# EAGLE board konzole_single (EAGLE 9.6.2)
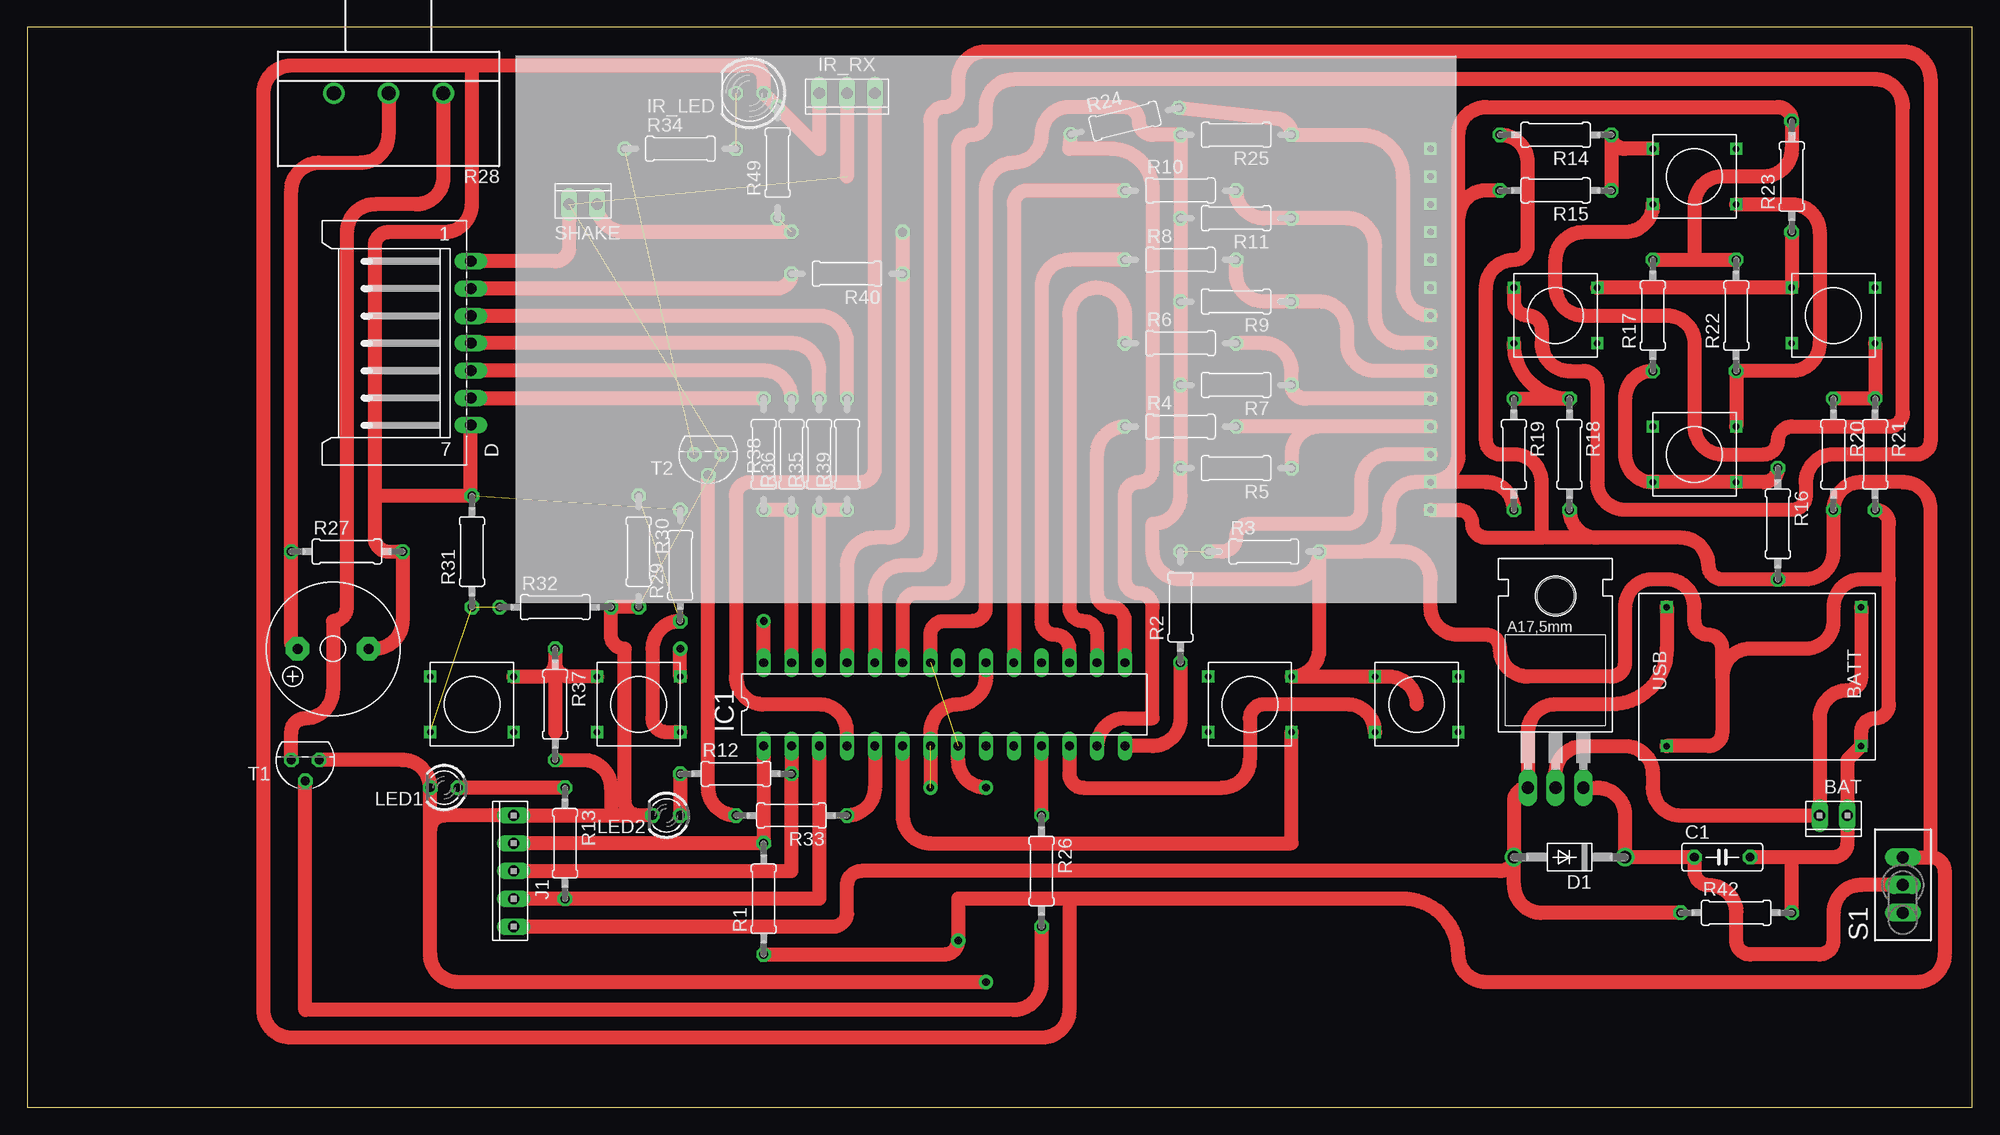
[diagram p0: board, top side]
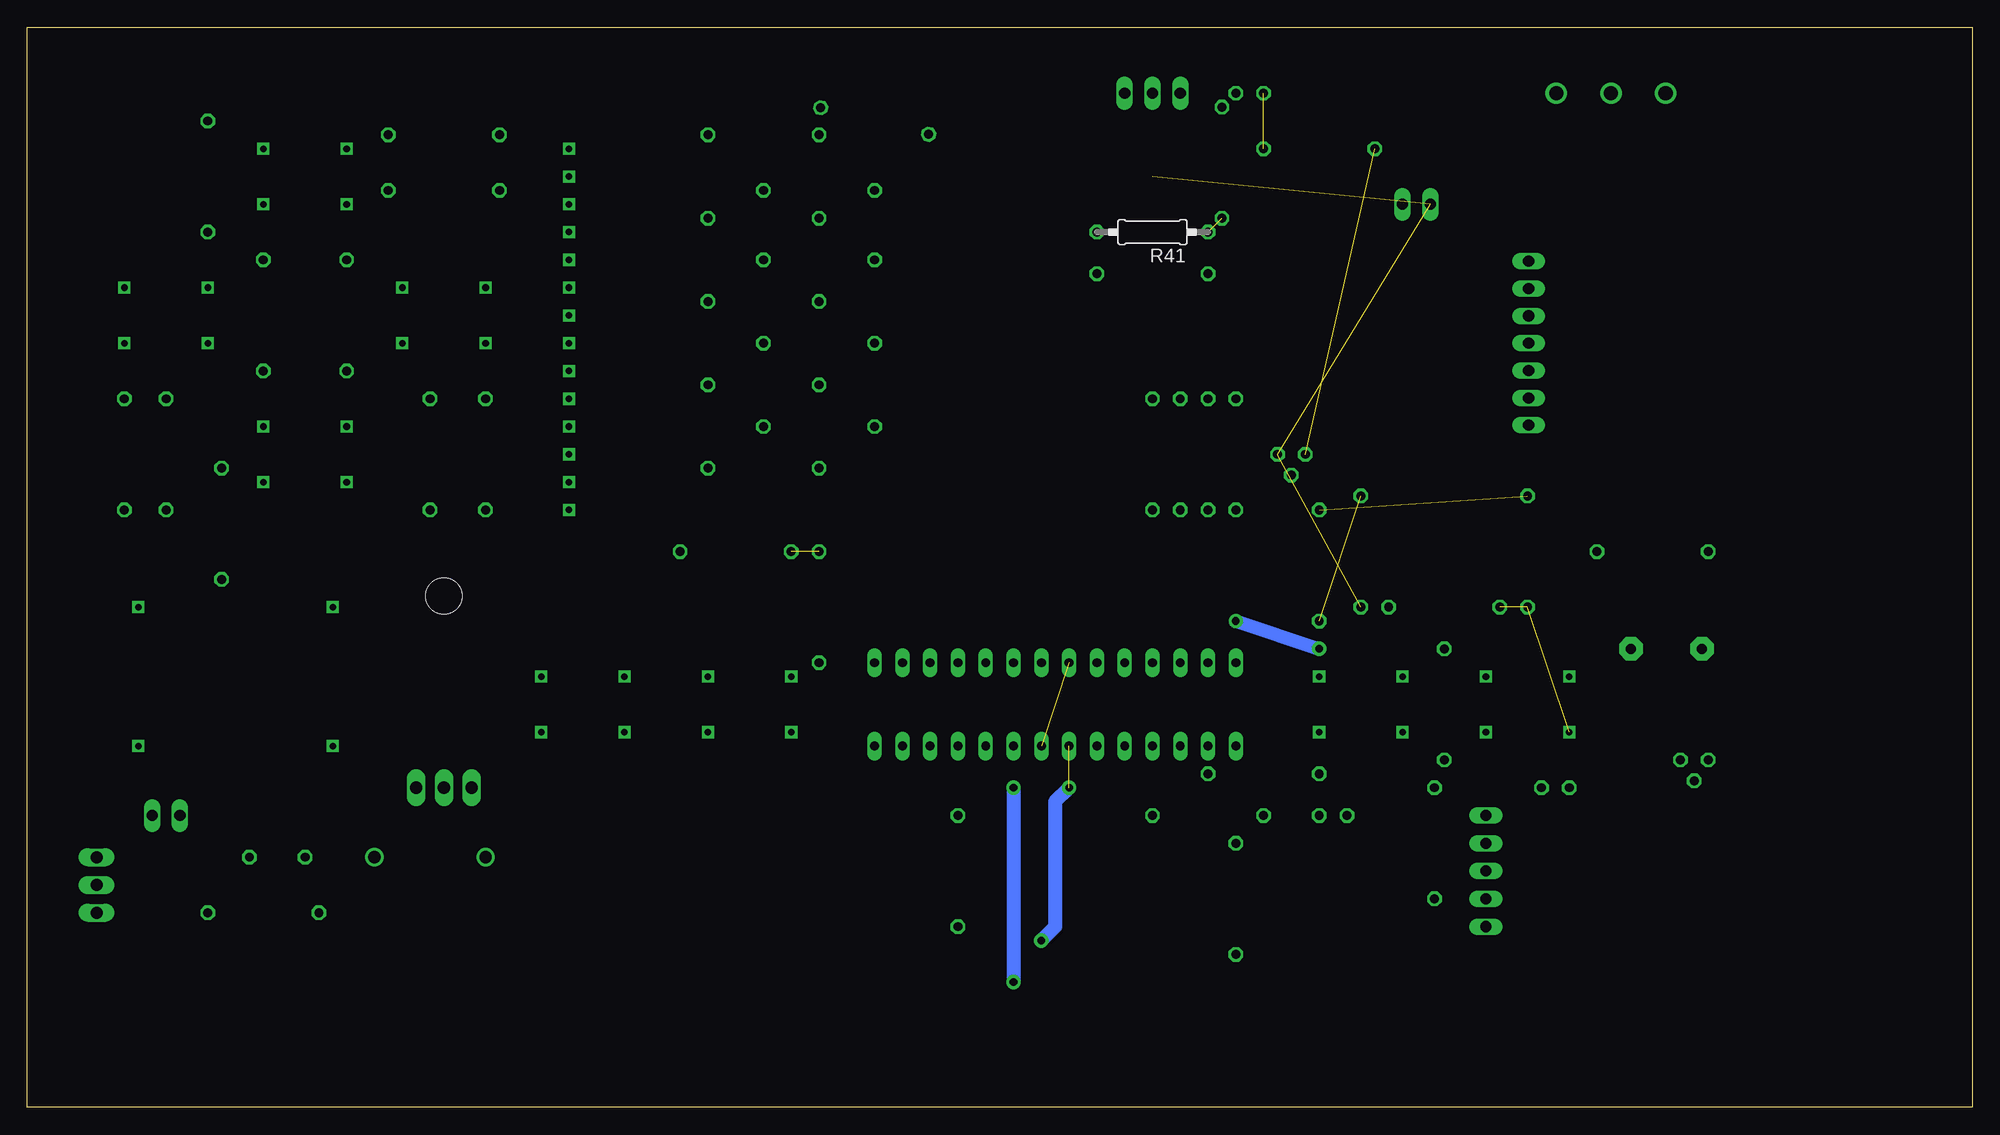
[diagram p1: board, bottom side, seen from below]

Size 177.78 x 98.73 mm. Coordinates in mm from the lower left corner, seen from the top.
Outline: 0,0 177.78,0 177.78,98.73 0,98.73 0,0
Copper layers (1*16): Top 0.035mm / dielectric 1.5mm / Bottom 0.035mm
Design rules "default": minimum track width 6mil, minimum drill 0.35mm, track to track 6mil, track to pad 6mil, pad to pad 6mil, via to via 6mil, smd to smd 6mil, copper to edge 40mil, drill to drill 6mil, minimum pad ring 10mil, minimum via ring 8mil, stop-mask expansion 4mil, vias tented up to drill 0mil, thermal gap 10mil

## Footprints (pad centres in the part's own frame; a part is rotated, then mirrored left to right if it is on the bottom)
10X02MTA = drill 1.016 long: 1 1.27,0; 2 -1.27,0
C050-025X075 = drill 0.813 octagon: 1 -2.54,0; 2 2.54,0
L07P = drill 1.016 long: 1 7.5,-6.25; 2 5,-6.25; 3 2.5,-6.25; 4 0,-6.25; 5 -2.5,-6.25; 6 -5,-6.25; 7 -7.5,-6.25
DO41-10 = drill 1.118: A 5.08,0; C -5.08,0
DIL28-3 = drill 0.813 long: 1 -16.51,-3.81; 2 -13.97,-3.81; 3 -11.43,-3.81; 4 -8.89,-3.81; 5 -6.35,-3.81; 6 -3.81,-3.81; 7 -1.27,-3.81; 8 1.27,-3.81; 9 3.81,-3.81; 10 6.35,-3.81; 11 8.89,-3.81; 12 11.43,-3.81; 13 13.97,-3.81; 14 16.51,-3.81; 15 16.51,3.81; 16 13.97,3.81; 17 11.43,3.81; 18 8.89,3.81; 19 6.35,3.81; 20 3.81,3.81; 21 1.27,3.81; 22 -1.27,3.81; 23 -3.81,3.81; 24 -6.35,3.81; 25 -8.89,3.81; 26 -11.43,3.81; 27 -13.97,3.81; 28 -16.51,3.81
LED5MM = drill 0.813 octagon: A -1.27,0; K 1.27,0
10X03MTA = drill 1.016 long: 1 2.54,0; 2 0,0; 3 -2.54,0
10X05MTA = drill 1.016 long: 1 5.08,0; 2 2.54,0; 3 0,0; 4 -2.54,0; 5 -5.08,0
LED3MM = drill 0.813 octagon: A -1.27,0; K 1.27,0
TO220BH = drill 1.118 long: D 0,-6.35; G -2.54,-6.35; S 2.54,-6.35 | hole 3.302: 0,11.176
0207/10 = drill 0.813 octagon: 1 -5.08,0; 2 5.08,0
CIP20C-6MM = drill 1.3 pad 1.93: A -5,0; E 5,0; S 0,0
TL3XPO = drill 1.1 pad 1.422 long: 1 -2.54,0; 2 0,0; 3 2.54,0
F/QMX = drill 0.914 pad 2.159 octagon: + 3.251,0; - -3.251,0
TO92 = drill 0.813 octagon: 1 1.27,0; 2 0,1.905; 3 -1.27,0
TACT = drill 0.6 square: P$1 -3.81,2.54; P$2 -3.81,-2.54; P$3 3.81,-2.54; P$4 3.81,2.54
DISPLAY = drill 0.6 square: CS -40.64,11.43; D/C -40.64,6.35; GND -40.64,13.97; LED -40.64,-1.27; RESET -40.64,8.89; SCK -40.64,1.27; SDI -40.64,3.81; SDO -40.64,-3.81; T_CLK -40.64,-6.35; T_CS -40.64,-8.89; T_DIN -40.64,-11.43; T_IRQ -40.64,-16.51; T_OUT -40.64,-13.97; VCC -40.64,16.51
LI_ION_CHARGER = drill 0.6 square: BAT+ 8.89,6.35; BAT- 8.89,-6.35; GND -8.89,-6.35; VIN -8.89,6.35

## Placement (x,y rotation side)
BAT  [10X02MTA]  165.1,26.67 180 top
C1  1uF  [C050-025X075]  154.94,22.86 0 top
D  [L07P]  34.29,69.85 90 top
D1  1N4004  [DO41-10]  140.97,22.86 180 top
IC1  MEGA8-P  [DIL28-3]  83.82,36.83 0 top
IR_LED  [LED5MM]  66.04,92.71 180 top
IR_RX  [10X03MTA]  74.93,92.71 180 top
J1  [10X05MTA]  44.45,21.59 90 top
LED1  [LED3MM]  38.1,29.21 180 top
LED2  [LED3MM]  58.42,26.67 180 top
Q1  IRF4905  [TO220BH]  139.7,35.56 0 top
R1  10k  [0207/10]  67.31,19.05 90 top
R2  1k  [0207/10]  105.41,45.72 90 top
R3  2k  [0207/10]  113.03,50.8 0 top
R4  1k  [0207/10]  105.41,62.23 0 top
R5  2k  [0207/10]  110.49,58.42 180 top
R6  1k  [0207/10]  105.41,69.85 0 top
R7  2k  [0207/10]  110.49,66.04 180 top
R8  1k  [0207/10]  105.41,77.47 0 top
R9  2k  [0207/10]  110.49,73.66 180 top
R10  1k  [0207/10]  105.41,83.82 0 top
R11  2k  [0207/10]  110.49,81.28 180 top
R12  10k  [0207/10]  64.77,30.48 0 top
R13  10k  [0207/10]  49.15,24.13 270 top
R14  10k  [0207/10]  139.7,88.9 180 top
R15  1k  [0207/10]  139.7,83.82 180 top
R16  10k  [0207/10]  160.02,53.34 270 top
R17  3k  [0207/10]  148.59,72.39 90 top
R18  10k  [0207/10]  140.97,59.69 270 top
R19  1k  [0207/10]  135.89,59.69 270 top
R20  10k  [0207/10]  165.1,59.69 270 top
R21  3k  [0207/10]  168.91,59.69 270 top
R22  10k  [0207/10]  156.21,72.39 90 top
R23  10k  [0207/10]  161.29,85.09 90 top
R24  1k  [0207/10]  100.33,90.17 13.8 top
R25  2k  [0207/10]  110.49,88.9 180 top
R26  1k  [0207/10]  92.71,21.59 270 top
R27  1k  [0207/10]  29.21,50.8 0 top
R28  [CIP20C-6MM]  33.02,92.71 180 top
R29  10k  [0207/10]  59.69,49.53 90 top
R30  1k  [0207/10]  55.88,50.8 270 top
R31  10k  [0207/10]  40.64,50.8 90 top
R32  3k  [0207/10]  48.26,45.72 0 top
R33  1k  [0207/10]  69.85,26.67 180 top
R34  47Ohm  [0207/10]  59.69,87.63 0 top
R35  1k  [0207/10]  72.39,59.69 90 top
R36  2k  [0207/10]  69.85,59.69 90 top
R37  10k  [0207/10]  48.26,36.83 270 top
R38  1k  [0207/10]  67.31,59.69 90 top
R39  2k  [0207/10]  74.93,59.69 90 top
R40  1k  [0207/10]  74.93,76.2 180 top
R41  2k  [0207/10]  74.93,80.01 180 bottom
R42  100k  [0207/10]  156.21,17.78 0 top
R49  10k  [0207/10]  68.58,86.36 90 top
S1  TL36PO  [TL3XPO]  171.45,20.32 90 top
SG1  F/QMX  [F/QMX]  27.94,41.91 180 top
SHAKE  [10X02MTA]  50.8,82.55 0 top
T1  2N3904  [TO92]  25.4,31.75 180 top
T2  2N3904  [TO92]  62.23,59.69 180 top
U$1  TACT  [TACT]  152.4,85.09 0 top
U$2  DISPLAY  [DISPLAY]  87.63,71.12 180 top
U$3  TACT  [TACT]  139.7,72.39 0 top
U$4  TACT  [TACT]  165.1,72.39 0 top
U$5  TACT  [TACT]  152.4,59.69 180 top
U$6  TACT  [TACT]  111.76,36.83 0 top
U$7  TACT  [TACT]  127,36.83 0 top
U$8  TACT  [TACT]  55.88,36.83 180 top
U$9  TACT  [TACT]  40.64,36.83 180 top
U$10  LI_ION_CHARGER  [LI_ION_CHARGER]  158.75,39.37 0 top

## Library data of the parts
BAT IR_RX J1 SHAKE = con-amp
C1 = rcl; SPICEPREFIX: C
D = con-amp-mt; OC_FARNELL: unknown; OC_NEWARK: unknown
D1 = diode
IC1 = atmel; OC_FARNELL: unknown; OC_NEWARK: unknown
IR_LED LED1 LED2 = led
Q1 = transistor-power
R1-R27 R29-R42 R49 = rcl; SPICEPREFIX: R
R28 = pot
S1 = switch
SG1 = buzzer; OC_FARNELL: unknown; OC_NEWARK: unknown
T1 T2 = transistor
U$1-U$10 = PSicho

## Nets
+5V: D.7 IC1.7 IC1.20 IR_LED.A IR_RX.1 R1.1 R14.2 R16.2 R18.2 R20.2 R27.2 R29.2 R31.2 R49.2 S1.3 SG1.- U$2.VCC
GND: BAT.2 C1.2 D.1 IC1.8 IC1.22 IR_RX.2 J1.1 LED1.K LED2.K R3.2 R5.2 R7.2 R9.2 R11.2 R15.2 R17.2 R19.2 R21.2 R22.2 R23.2 R25.2 R30.2 R32.2 R37.2 R42.2 SHAKE.2 T1.3 T2.3 U$2.GND U$6.P$4 U$7.P$1 U$10.BAT- U$10.GND
N$1: IC1.1 J1.2 R1.2
N$2: R2.2 R3.1 U$2.CS
N$3: R4.2 R5.1 U$2.RESET
N$4: R6.2 R7.1 U$2.D/C
N$5: R8.2 R9.1 U$2.SDI
N$6: R10.2 R11.1 U$2.SCK
N$7: IC1.17 R8.1
N$8: IC1.13 R24.1
N$9: IC1.16 R6.1
N$10: IC1.15 R4.1
N$11: R14.1 R15.1 U$1.P$1
N$12: R27.1 R28.S SG1.+
N$13: IC1.19 R10.1
N$14: R16.1 R17.1 U$5.P$1 U$5.P$4
N$15: R18.1 R19.1 U$3.P$2
N$16: R20.1 R21.1 U$4.P$3
N$17: LED1.A R13.1
N$18: LED2.A R12.1
N$19: IC1.2 J1.3 R12.2
N$20: IC1.3 J1.4 R13.2
N$21: R23.1 U$3.P$4 U$4.P$1
N$22: R22.1 U$1.P$3 U$5.P$2
N$23: IC1.23 U$1.P$2
N$24: R24.2 R25.1 U$2.LED
N$25: IC1.24 U$3.P$1
N$26: R26.2 T1.2
N$27: IC1.11 R26.1
N$28: R28.A T1.1
N$29: R29.1 R30.1 U$8.P$1
N$30: IC1.14 R2.1
N$31: R31.1 R32.1 U$9.P$4
N$32: IC1.12 U$7.P$2
N$33: IC1.28 U$8.P$2
N$34: IC1.6 U$6.P$3
N$35: R37.1 U$8.P$3 U$9.P$2
N$36: IC1.4 IR_RX.3
N$37: R33.2 T2.2
N$38: R34.1 T2.1
N$39: IR_LED.K R34.2
N$40: IC1.5 R33.1
N$41: D.6 R38.2
N$42: D.5 R36.2
N$43: D.4 R35.2
N$44: BAT.1 Q1.D U$10.BAT+
N$45: D.3 R39.2
N$46: D.2 R40.2
N$48: IC1.26 R35.1 R39.1
N$49: R41.1 R49.1 SHAKE.1
N$50: D1.A J1.5 Q1.G R42.1 U$10.VIN
N$51: C1.1 D1.C Q1.S S1.2
N$52: IC1.25 R40.1 R41.2
N$54: IC1.27 R36.1 R38.1

## Tracks (layer width: path | path; a pad name or v marks a point on that pad's centre or on a via)
+5V  (via drill 0.7 pad 1.3)  (2 unrouted)
  Top 1.27: U$2.VCC 130.81,54.61 arc-90 132.08,53.34 arc90 133.35,52.07 138.43,52.07 | R14.2 arc-90 137.16,86.36 137.16,78.74 arc-90 135.89,77.47 arc90 133.35,74.93 133.35,60.96 arc90 134.62,59.69 135.89,59.69 arc-90 138.43,57.15 138.43,52.07 | R18.2 arc90 143.51,52.07 | 143.51,52.07 151.13,52.07 arc-90 153.67,49.53 arc90 154.94,48.26 R16.2 162.56,48.26 arc90 165.1,50.8 R20.2 arc-90 167.64,57.15 171.45,57.15 arc-90 173.99,54.61 173.99,22.86 | 143.51,52.07 138.43,52.07 | IR_RX.1 72.39,87.63 R49.2 IR_LED.A 67.31,93.98 arc90 66.04,95.25 40.64,95.25 | S1.3 173.99,22.86 | 173.99,22.86 arc-90 175.26,21.59 175.26,13.97 arc-90 172.72,11.43 133.35,11.43 arc-90 130.81,13.97 arc90 125.73,19.05 95.25,19.05 | IC1.20 87.63,39.37 arc-90 85.09,36.83 arc90 82.55,34.29 v82.55,29.21 | SG1.- 31.75,41.91 arc90 34.29,44.45 R27.2 33.02,50.8 arc-90 31.75,52.07 31.75,55.88 | 95.25,19.05 85.09,19.05 v85.09,15.24 arc-90 83.82,13.97 R1.1 | 31.75,55.88 31.75,78.74 arc-90 33.02,80.01 38.1,80.01 arc90 40.64,82.55 40.64,95.25 | 95.25,19.05 95.25,8.89 arc-90 92.71,6.35 24.13,6.35 arc-90 21.59,8.89 21.59,92.71 arc-90 24.13,95.25 40.64,95.25 | D.7 40.54,55.98 arc90 R31.2 31.75,55.88
  Bottom 1.27: v82.55,29.21 83.82,27.94 83.82,16.51 v85.09,15.24
GND  (via drill 0.7 pad 1.3)  (4 unrouted)
  Top 1.27: U$2.GND 127,57.15 arc90 124.46,54.61 124.46,53.34 arc-90 121.92,50.8 | R3.2 121.92,50.8 | R3.2 arc-90 115.57,48.26 105.41,48.26 arc-90 102.87,50.8 102.87,53.34 arc90 105.41,55.88 R5.2 R7.2 R9.2 R11.2 R25.2 102.87,88.9 arc-90 101.6,90.17 arc90 100.33,91.44 95.25,91.44 arc90 92.71,88.9 arc-90 90.17,86.36 arc90 87.63,83.82 87.63,45.72 arc-90 86.36,44.45 83.82,44.45 arc90 82.55,43.18 IC1.22 82.55,41.91 | R17.2 152.4,77.47 | 152.4,77.47 R22.2 | R15.2 133.35,83.82 arc90 130.81,81.28 | U$2.GND arc90 130.81,59.69 130.81,81.28 | 130.81,81.28 130.81,88.9 arc-90 133.35,91.44 160.02,91.44 arc-90 R23.2 161.29,87.63 arc-90 158.75,85.09 154.94,85.09 arc90 152.4,82.55 152.4,77.47 | R21.2 arc-90 170.18,53.34 170.18,48.26 | 170.18,48.26 170.18,36.83 arc-90 168.91,35.56 arc90 167.64,34.29 U$10.BAT- 166.37,31.75 BAT.2 166.37,24.13 arc-90 165.1,22.86 161.29,22.86 | R19.2 arc90 133.35,57.15 U$2.GND | R42.2 161.29,22.86 | 170.18,48.26 167.64,48.26 arc90 165.1,45.72 165.1,44.45 arc-90 162.56,41.91 157.48,41.91 arc90 154.94,39.37 | 154.94,39.37 154.94,34.29 arc-90 153.67,33.02 U$10.GND | 154.94,39.37 154.94,41.91 arc90 153.67,43.18 arc-90 152.4,44.45 152.4,45.72 arc90 149.86,48.26 148.59,48.26 arc90 146.05,45.72 146.05,40.64 arc-90 144.78,39.37 137.16,39.37 arc-90 134.62,41.91 arc90 133.35,43.18 130.81,43.18 arc-90 128.27,45.72 128.27,48.26 arc90 125.73,50.8 121.92,50.8 | 161.29,22.86 C1.2 | R3.2 118.11,41.91 arc-90 U$6.P$4 U$7.P$1 124.46,39.37 arc-90 127,36.83 | D.1 48.26,77.35 arc90 49.53,78.62 SHAKE.2 | v87.63,11.43 39.37,11.43 arc-90 36.83,13.97 36.83,25.4
  Top 1.27: v87.63,29.21 arc-90 85.09,31.75 IC1.8 | 36.83,25.4 arc-90 38.1,26.67 J1.1 53.34,26.67 | 36.83,25.4 LED1.K arc90 34.29,31.75 T1.3 | 53.34,26.67 55.88,26.67 | LED2.K 55.88,26.67 | R37.2 50.8,31.75 arc-90 53.34,29.21 53.34,26.67 | IR_RX.2 74.93,85.09 | 55.88,26.67 arc-90 54.61,27.94 54.61,41.91 arc-90 53.34,43.18 R32.2 R30.2
  Bottom 1.27: v87.63,29.21 v87.63,11.43
N$1
  Top 1.27: IC1.1 R1.2 J1.2
N$2  (1 unrouted)
  Top 1.27: U$2.CS 124.46,59.69 arc90 121.92,57.15 121.92,54.61 arc-90 120.65,53.34 111.76,53.34 arc90 110.49,52.07 arc-90 109.22,50.8 R3.1
N$3
  Top 1.27: R5.1 115.57,59.69 arc-90 118.11,62.23 U$2.RESET R4.2
N$4
  Top 1.27: U$2.D/C 116.84,64.77 arc-90 R7.1 115.57,67.31 arc90 113.03,69.85 R6.2
N$5
  Top 1.27: U$2.SDI 123.19,67.31 arc-90 120.65,69.85 120.65,71.12 arc90 118.11,73.66 R9.1 113.03,73.66 arc-90 110.49,76.2 R8.2
N$6
  Top 1.27: U$2.SCK 125.73,69.85 arc-90 123.19,72.39 123.19,78.74 arc90 120.65,81.28 R11.1 113.03,81.28 arc-90 R10.2
N$7
  Top 1.27: R8.1 95.25,77.47 arc90 92.71,74.93 92.71,44.45 arc90 93.98,43.18 arc-90 95.25,41.91 IC1.17
N$8
  Top 1.27: IC1.13 arc-90 100.33,35.56 102.87,35.56 102.87,45.72 arc90 101.6,46.99 arc-90 100.33,48.26 100.33,55.88 arc-90 101.6,57.15 arc90 102.87,58.42 102.87,83.82 arc90 99.06,87.63 95.25,87.63 R24.1
N$9
  Top 1.27: R6.1 100.33,72.39 arc90 97.79,74.93 arc90 95.25,72.39 95.25,45.72 arc90 96.52,44.45 arc-90 97.79,43.18 IC1.16
N$10
  Top 1.27: IC1.15 100.33,44.45 arc90 99.06,45.72 arc-90 97.79,46.99 97.79,59.69 arc-90 R4.1
N$11
  Top 1.27: U$1.P$1 146.05,87.63 arc-90 R14.1 R15.1
N$12
  Top 1.27: R28.S 33.02,88.9 arc-90 30.48,86.36 26.67,86.36 arc90 24.13,83.82 R27.1 24.13,42.47 arc90 SG1.+
N$13
  Top 1.27: R10.1 91.44,83.82 arc90 90.17,82.55 IC1.19
N$14
  Top 1.27: R17.1 arc90 146.05,64.77 146.05,59.69 arc90 U$5.P$4 U$5.P$1 158.75,57.15 arc90 R16.1
N$15
  Top 1.27: R19.1 R18.1 arc-90 U$3.P$2
N$16
  Top 1.27: U$4.P$3 R21.1 R20.1
N$17
  Top 1.27: R13.1 LED1.A
N$18
  Top 1.27: R12.1 LED2.A
N$19
  Top 1.27: IC1.2 R12.2 69.85,21.59 J1.3
N$20
  Top 1.27: J1.4 R13.2 49.53,19.05 72.39,19.05 IC1.3
N$21
  Top 1.27: R23.1 U$4.P$1 U$3.P$4
N$22
  Top 1.27: U$1.P$3 161.29,82.55 arc-90 163.83,80.01 163.83,69.85 arc-90 161.29,67.31 R22.1 U$5.P$2
N$23
  Top 1.27: U$1.P$2 arc-90 146.05,80.01 142.24,80.01 arc90 139.7,77.47 139.7,74.93 arc90 142.24,72.39 149.86,72.39 arc-90 152.4,69.85 152.4,62.23 arc90 154.94,59.69 158.75,59.69 arc90 160.02,60.96 arc-90 161.29,62.23 170.18,62.23 arc90 171.45,63.5 171.45,91.44 arc90 168.91,93.98 90.17,93.98 arc90 87.63,91.44 87.63,90.17 arc-90 86.36,88.9 arc90 85.09,87.63 85.09,48.26 arc-90 83.82,46.99 81.28,46.99 arc90 80.01,45.72 IC1.23
N$24
  Top 1.27: U$2.LED arc-90 125.73,74.93 125.73,85.09 arc90 121.92,88.9 R25.1 arc90 114.07,90.4 R24.2
N$25
  Top 1.27: U$3.P$1 135.89,73.66 arc90 137.16,72.39 arc-90 138.43,71.12 138.43,69.85 arc90 140.97,67.31 142.24,67.31 arc-90 143.51,66.04 143.51,57.15 arc90 146.05,54.61 161.29,54.61 arc90 162.56,55.88 162.56,57.15 arc-90 165.1,59.69 172.72,59.69 arc90 173.99,60.96 173.99,93.98 arc90 171.45,96.52 87.63,96.52 arc90 85.09,93.98 85.09,92.71 arc-90 83.82,91.44 arc90 82.55,90.17 82.55,50.8 arc-90 81.28,49.53 80.01,49.53 arc90 77.47,46.99 IC1.24
N$26
  Top 1.27: R26.2 92.71,11.43 arc-90 90.17,8.89 25.4,8.89 T1.2
N$27
  Top 1.27: R26.1 IC1.11
N$28
  Top 1.27: R28.A 38.02,85.01 arc-90 35.56,82.55 31.75,82.55 arc90 29.21,80.01 29.21,45.72 arc-90 27.94,44.45 27.94,38.1 arc-90 25.4,35.56 arc90 24.13,34.29 T1.1
N$29  (1 unrouted)
  Top 1.27: R29.1 arc90 57.15,41.91 57.15,35.56 arc90 58.42,34.29 U$8.P$1
N$30
  Top 1.27: R2.1 105.41,35.56 arc-90 102.87,33.02 IC1.14
N$31  (2 unrouted)
N$32
  Top 1.27: U$7.P$2 arc90 120.65,36.83 113.03,36.83 arc90 111.76,35.56 111.76,31.75 arc-90 109.22,29.21 96.52,29.21 arc-90 95.25,30.48 IC1.12
N$33  (via drill 0.7 pad 1.3)
  Top 1.27: U$8.P$2 v59.69,41.91 | IC1.28 v67.31,44.45
  Bottom 1.27: v67.31,44.45 v59.69,41.91
N$34
  Top 1.27: IC1.6 80.01,26.67 arc90 82.55,24.13 115.57,24.13 U$6.P$3
N$35
  Top 1.27: R37.1 48.26,40.64 | 48.26,40.64 48.26,34.29 | U$9.P$2 46.99,39.37 arc90 48.26,40.64 | U$8.P$3 49.53,39.37 arc-90 48.26,40.64
N$36
  Top 1.27: IC1.4 74.93,34.29 arc90 72.39,36.83 67.31,36.83 arc-90 64.77,39.37 64.77,55.88 arc-90 66.04,57.15 76.2,57.15 arc90 77.47,58.42 IR_RX.3
N$37
  Top 1.27: R33.2 arc-90 62.23,29.21 T2.2
N$38  (1 unrouted)
N$39  (1 unrouted)
N$40
  Top 1.27: IC1.5 77.47,29.21 arc-90 R33.1
N$41
  Top 1.27: R38.2 40.62,64.77 arc-90 D.6
N$42
  Top 1.27: R36.2 69.85,64.81 arc90 67.31,67.35 D.5
N$43
  Top 1.27: R35.2 72.39,67.31 arc90 69.85,69.85 D.4
N$44
  Top 1.27: U$10.BAT+ 167.64,39.37 arc-90 166.37,38.1 arc90 163.83,35.56 BAT.1 151.13,26.67 arc-90 148.59,29.21 148.59,30.48 arc90 146.05,33.02 142.24,33.02 arc90 139.7,30.48 Q1.D
N$45
  Top 1.27: D.3 arc90 40.5,72.39 arc-90 D.3 | R39.2 74.93,69.81 arc90 72.39,72.35 D.3
N$46
  Top 1.27: R40.2 arc-90 68.5,74.85 D.2
N$48
  Top 1.27: R39.1 R35.1 IC1.26
N$49  (1 unrouted)
  Top 1.27: R41.1 54.61,80.01 arc-90 SHAKE.1
N$50
  Top 1.27: D1.A 135.89,27.94 arc-90 Q1.G 137.16,34.29 arc-90 139.7,36.83 144.78,36.83 arc90 149.86,41.91 U$10.VIN | R42.1 138.43,17.78 arc-90 135.89,20.32 D1.A | J1.5 73.66,16.51 arc90 74.93,17.78 74.93,20.32 arc-90 76.2,21.59 134.62,21.59 arc90 D1.A
N$51
  Top 1.27: Q1.S 143.51,29.21 arc-90 146.05,26.67 D1.C C1.1 152.4,21.59 arc90 153.67,20.32 arc-90 156.21,17.78 156.21,15.24 arc90 157.48,13.97 163.83,13.97 arc90 165.1,15.24 165.1,17.78 arc-90 167.64,20.32 S1.2
N$52
  Top 1.27: R41.2 R40.1 80.01,53.34 arc-90 78.74,52.07 77.47,52.07 arc90 74.93,49.53 IC1.25
N$54
  Top 1.27: IC1.27 R36.1 R38.1